# Altium PCB 24V0.5A.PcbDoc
Units mm, origin at the board's own origin, x right, y up, seen from the top; angles counter-clockwise.
Board outline 101.86 x 31.11 mm, 2 copper layers (Top Layer, Bottom Layer); 27 components, 16 nets, 66 pads, 4 vias.
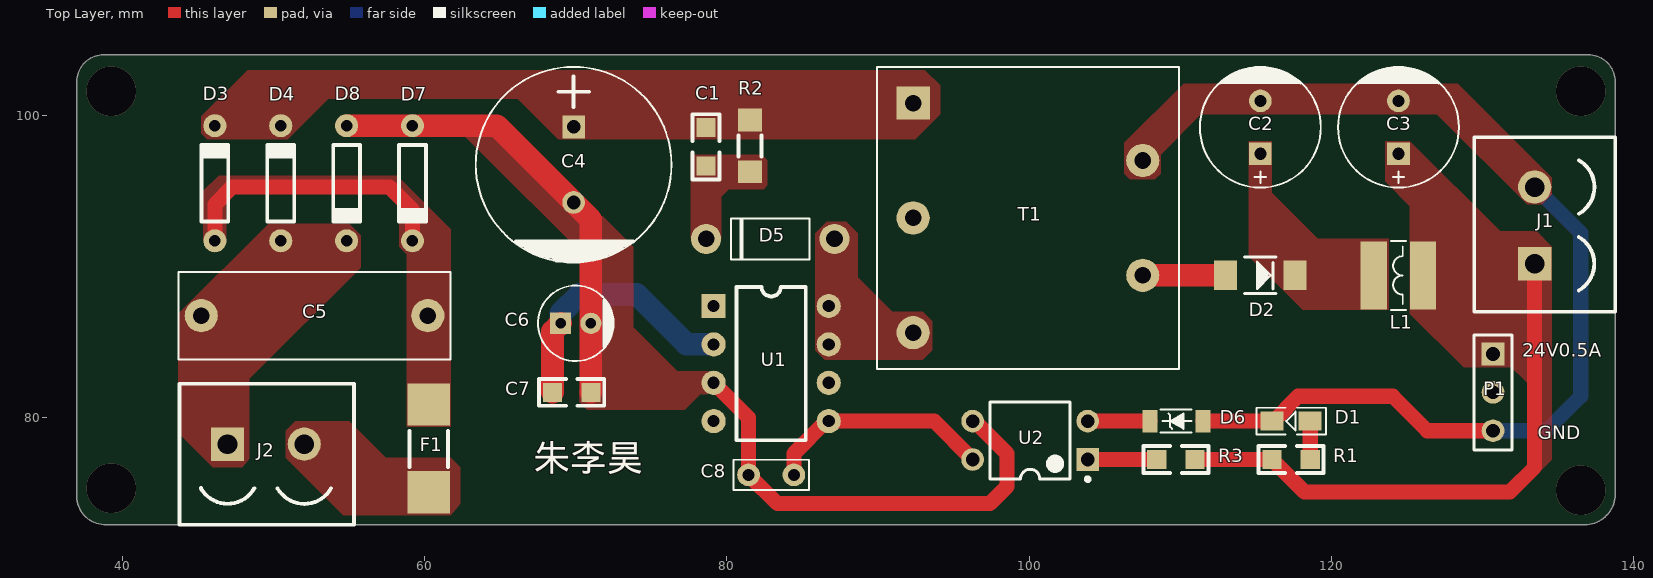
[diagram p0: Top Layer view]
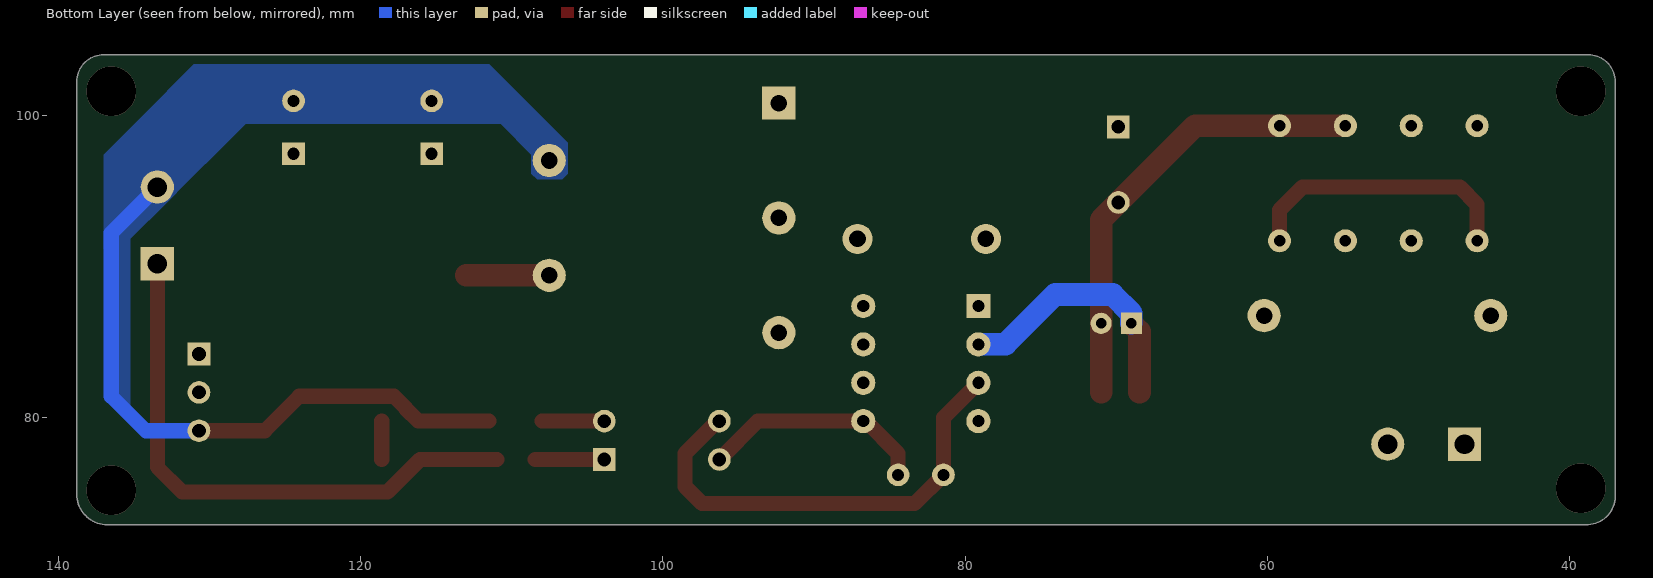
[diagram p1: Bottom Layer view, seen from below]

## Layer stack, top to bottom
Top Solder: solder mask 0.0102, Solder Resist, Dk 3.5
Top Layer: signal copper 0.0356
Dielectric 1: dielectric 0.32, FR-4, Dk 4.8
Bottom Layer: signal copper 0.0356
Bottom Solder: solder mask 0.0102, Solder Resist, Dk 3.5

## Board outline
36.957,74.93 36.957,102.235 cw(c38.735,102.235) 38.735,104.013 137.033,104.013 cw(c137.033,102.235) 138.811,102.235 138.811,74.93 cw(c136.779,74.93) 136.779,72.898 38.735,72.898 cw(c38.862,74.803)

## Design rules (kind name [scope] priority, off if disabled: settings)
Clearance [All] p1: gap=0.254 ignorepadtopadclearanceinfootprint=FALSE except(0: Arc-Hole Track-Hole SMDPad-Hole THPad-Hole Via-Hole Fill-Hole Poly-Hole Region-Hole Text-Hole)
PolygonConnect [All] p1: connectstyle=Direct reliefconductorwidth=0.254 reliefentries=4 polygonreliefangle="90 Angle" airgapwidth=0.254
RoutingVias [All] p1: holewidth=0.711 width=1.27 viastyle="Through Hole" minholewidth=0.711 minwidth=1.27 maxholewidth=4 maxwidth=4
SolderMaskExpansion [All] p1: expansion=0.102 istentingtop=FALSE
Width [All] p1: maxlimit=1.5 minlimit=0.254 preferedwidth=1
30 further rules are at their usual default settings.

## Components (designator, comment, footprint, x,y, rotation, side; value= is the part's Value field where it differs from the comment)
C1 "103 250V" CAP_0805 78.613,96.647 r90 top
C2 "470uF 25V" "CAP POLL 直插电解质8*12/8*16" 115.316,99.211 r90 top
C3 "470uF 25V" "CAP POLL 直插电解质8*12/8*16" 124.46,99.211 r90 top
C4 "33uF 400V" "Cap POLL 直插电解质 13*20" 69.85,99.234 r270 top
C5 "104" Cap安规104 45.198,86.741 r0 top
C6 "22uF 16V" "CAP POLL 直插电解质5*12" 69.993,86.233 r0 top
C7 "22uF 10V" CAP_0805 68.453,81.661 r0 top
C8 "103" CAP瓷片直插 82.931,76.2 r0 top
D1 "LED_" LED_0805 118.618,79.756 r180 top
D2 "US1G" DIO_214 113.016,89.408 r0 top
D3 "1N4007" 直插二极管 46.101,91.694 r90 top
D4 "1N4007" 直插二极管 50.461,91.694 r90 top
D5 "HER107" DO-41 87.122,91.821 r180 top
D6 "22V" LL-34 111.506,79.756 r180 top
D7 "1N4007" 直插二极管 59.182,99.314 r270 top
D8 "1N4007" 直插二极管 54.822,99.314 r270 top
F1 "Fuse" 2410 60.26,75.057 r90 top
J1 "接线端子2P" 接线端子2P 133.477,90.17 r90 top
J2 "接线端子2P" 接线端子2P 46.936,78.232 r0 top
L1 "Inductor_" Inductor_SM4532 122.835,89.408 r0 top value=10uH
P1 "Header 3" HDR1X3 130.72,84.201 r270 top
R1 "51K" Res_0805 118.618,77.216 r180 top
R2 "100K 0.25W" 1206 81.534,96.266 r90 top
R3 "2K 1%" Res_0805 108.458,77.216 r0 top
T1 "变压器-双边-8引脚" 变压器EE20-5_5-剪脚 99.929,93.211 r0 top
U1 "DK1203" DIP-8 79.121,87.376 r0 top
U2 "PC817A" DIP-4 100.076,78.486 r180 top

## Footprints (in the part's own frame and the unit in brackets; to place one, negate y for a bottom-side part, rotate by r counter-clockwise, add the part's x,y. Pads: shape width x height; smd on the part's side, far side on the other; paste and mask are expansions set on the pad)
1206 [mm]
  rect 1.52x1.6 smd: 1(0,0) 2(3.42,0)
  silkscreen extent 1.02,-0.76 2.41,0.76
2410 [mm]
  rect 2.8x2.8 smd: 1(0,0) 2(5.8,0)
  silkscreen extent 1.65,-1.27 4.06,1.27
"CAP POLL 直插电解质5*12" [mm] "脚间距2mm 直径5mm"
  rect 1.4x1.4 hole 0.7: 1(-1,0)
  round 1.4 hole 0.7: 2(1,0)
  silkscreen extent -2.5,-2.5 2.5,2.5
"CAP POLL 直插电解质8*12/8*16" [mm] "脚间距3.5mm 直径8mm"
  rect 1.5x1.5 hole 0.8: 1(-1.75,0)
  round 1.5 hole 0.8: 2(1.75,0)
  silkscreen extent -4,-4 4,4
"Cap POLL 直插电解质 13*20" [mm] "直径12.5mm 脚间距5mm"
  rect 1.5x1.5 hole 0.9: 1(0,0)
  round 1.5 hole 0.9: 2(5,0)
  silkscreen extent -3.98,-6.48 8.98,6.48
CAP_0805 [mm] "Chip Capacitor, 2-Leads, Body 2.0x1.3mm, IPC Medium Density"
  rect 1.27x1.27 smd: 1(0,0) 2(2.54,0)
  silkscreen extent -0.89,-0.89 3.43,0.89
Cap安规104 [mm] "0.1uF  275VAC"
  round 2.2 hole 1.1: 1(0,0) 2(15,0)
  silkscreen extent -1.5,-2.9 16.5,2.9
CAP瓷片直插 [mm]
  round 1.5 hole 0.8: 1(-1.5,0) 2(1.5,0)
  silkscreen extent -2.5,-1 2.5,1
DIO_214 [mm] "Molded Diode, 2-Leads, Body 4.5x2.6mm, IPC Medium Density"
  rect 1.524x1.95 smd: 1(0,0) 2(4.6,0)
  silkscreen extent 1.25,-1.2 3.35,1.2, body extent 0.18,-1.2 4.42,1.19, height 3
DIP-4 [mm] "DIP; 4 Leads; Row Spacing 7.62 mm; Pitch 2.54 mm"
  rect 1.5x1.5 hole 0.9: 1(-3.81,1.27)
  round 1.5 hole 0.9: 2(-3.81,-1.27) 3(3.81,-1.27) 4(3.81,1.27)
  silkscreen extent -3.94,-2.55 2.65,2.69, body extent -3.15,-2.5 3.15,2.5, height 5.6
DIP-8 [mm] "脚间距2.54mm  宽7.62mm"
  rect 1.6x1.6 hole 0.8: 1(0,0)
  round 1.6 hole 0.8: 2(0,-2.54) 3(0,-5.08) 4(0,-7.62) 5(7.62,-7.62) 6(7.62,-5.08) 7(7.62,-2.54) 8(7.62,0)
  silkscreen extent 1.52,-8.89 6.1,1.27
DO-41 [mm] "二极管直插封装"
  round 2 hole 1.1: 1(0,0) 2(8.5,0)
  silkscreen extent 1.65,-1.35 6.85,1.35
HDR1X3 [mm] "Connector; Header; 3 Position"
  rect 1.5x1.5 hole 0.9: 1(0,0)
  round 1.5 hole 0.9: 2(2.54,0) 3(5.08,0)
  silkscreen extent -1.27,-1.27 6.35,1.27
Inductor_SM4532 [mm] "非屏蔽贴片功率电感"
  rect 1.75x4.5 smd: 1(0,0) 2(3.25,0)
  silkscreen extent 1.12,-2.29 2.13,2.29
LED_0805 [mil]
  rect 60x50 smd: 1(0,0) 2(100,0)
  silkscreen extent -41,-35 140,35
LL-34 [mm] "贴片稳压二极管"
  rect 1x1.5 smd: 1(0,0) 2(3.5,0)
  silkscreen extent 0.76,-0.76 2.79,0.76
Res_0805 [mm] "Chip Resistor, 2-Leads, Body 2.0x1.3mm, IPC Medium Density"
  rect 1.27x1.27 smd: 1(0,0) 2(2.54,0)
  silkscreen extent -0.89,-0.89 3.43,0.89
变压器EE20-5_5-剪脚 [mm] "EE20骨架，10个引脚  2、4、7、8、10剪脚"
  round 2.2 hole 1.1: 0(-7.6,0) 4(-7.6,-7.6) 6(7.6,3.8) 7(7.6,-3.8)
  rect 2.2x2.2 hole 1.1: 1(-7.6,7.6)
  silkscreen extent -10,-10 10,10
接线端子2P [mm]
  rect 2.2x2.2 hole 1.3: 1(0,0)
  round 2.2 hole 1.3: 2(5.08,0)
  silkscreen extent -3.18,-5.33 8.38,4
直插二极管 [mil]
  round 60 hole 30: 1(0,0) 2(300,0)
  silkscreen extent 50,-35 250,35

## Part data
C1 C5 C7 C8: library part Cap_2
C2 C3 C4 C6: library part Cap_
D2 D5: library part 1N4007
D6: library part 稳压二极管
P1: "Header, 3-Pin", LatestRevisionDate=17-Jul-2002, LatestRevisionNote="Re-released for DXP Platform.", Publisher="Altium Limited"
R1 R2 R3: library part Res_
U2: library part "光耦 - 1"
F1: I hold="2A 250V"

## Via types
v1: diameter 3.3, hole 3.3, Top Layer to Bottom Layer, 4 vias

## Nets (pads, with @x,y where several pads share a name; then routed paths per layer and width w, separated by ;. In a path a pad name is that pad's centre, name@x,y a point inside that pad or via, vN(x,y) a via of type N, cw(c..) or ccw(c..) an arc to the next point about the centre after c; other vN are vias at no path point)
24V/0.5A: C3.1 J1.1 L1.2 P1.1 R1.2 R3.2 | length 37.5
  Top Layer w1: R3.2 R1.2 118.237,75.057 131.826,75.057 133.477,76.708 J1.1
GND2: C2.2 C3.2 D1.2 D6.1 J1.2 P1.3 T1.6 | length 42.7
  Top Layer w1: D6.1 D1.2 116.205,79.756 117.047,80.598 117.047,80.648 117.806,81.407 124.079,81.407 126.365,79.121 P1.3
  Bottom Layer w1: P1.3 134.239,79.121 136.525,81.407 136.525,92.202 J1.2
L2: F1.1 J2.2
N2: C5.1 D4.1 D8.2 J2.1
NetC1_1: C1.1 D5.2 R2.1
NetC1_2: C1.2 C4.1 D3.2 D4.2 R2.2 T1.1
NetC2_1: C2.1 D2.2 L1.1
NetC4_2: C4.2 C6.2 C7.2 C8.1 D7.1 D8.1 U1.3 U2.3 | length 61
  Top Layer w1: U1.3 81.431,79.986 C8.1 83.336,74.295 97.409,74.295 98.552,75.438 98.552,77.605 96.401,79.756 U2.3
  Top Layer w1.5: D8.1 D7.1 64.77,99.314 70.993,93.091 C6.2 C7.2
NetC5_2: C5.2 D3.1 D7.2 F1.2 | length 18.8
  Top Layer w1: D3.1 46.101,94.107 47.244,95.25 57.658,95.25 59.182,93.726 D7.2 D7.2@59.182,91.836
NetC6_1: C6.1 C7.1 U1.2 | length 17.5
  Top Layer w1.5: C7.1 68.453,85.693 C6.1
  Bottom Layer w1.5: C6.1 68.993,86.9 70.231,88.138 74.041,88.138 77.324,84.855 79.102,84.855 U1.2
NetC8_2: C8.2 U1.5 U2.4 | length 15.2
  Top Layer w1: C8.2 84.431,77.608 86.579,79.756 93.726,79.756 U2.4
NetD1_1: D1.1 R1.1 | length 2.5
  Top Layer w1: R1.1 D1.1
NetD2_1: D2.1 T1.7 | length 5.5
  Top Layer w1.5: T1.7 107.531,89.409 113.015,89.409 D2.1
NetD5_1: D5.1 T1.4 U1.7 U1.8
NetD6_2: D6.2 U2.2 | length 4.1
  Top Layer w1: U2.2 D6.2
NetR3_1: R3.1 U2.1 | length 4.6
  Top Layer w1: U2.1 R3.1
pads on no net: P1.2 T1.0 U1.1 U1.4 U1.6
copper on no net:
  other v1: 136.525,75.184 39.243,75.311 39.243,101.6 136.525,101.6

## Polygon pours and split planes (outlines as drawn)
24V/0.5A on Top Layer "24V/0.5A_L01_P022" (solid, pour order 22): 132.207,89.408 134.366,89.408 134.366,85.852 132.207,83.693
GND2 on Top Layer "GND2_L01_P021" (solid, pour order 21): 106.299,98.171 110.236,102.108 128.397,102.108 134.62,95.885 134.62,94.742 133.985,94.107 132.969,94.107 127,100.076 111.379,100.076 108.712,97.409 108.712,96.139 108.331,95.758 106.68,95.758 106.299,96.139
24V/0.5A on Top Layer "24V/0.5A_L01_P019" (solid, pour order 19): 134.62,86.36 134.62,77.216 133.858,76.454 132.969,77.343 132.969,82.296 131.762,83.502
24V/0.5A on Top Layer "24V/0.5A_L01_P018" (solid, pour order 18): 123.571,98.298 123.571,95.631 125.222,93.98 125.222,86.868 128.778,83.312 131.953,83.312 134.62,85.979 134.62,91.313 133.604,92.329 131.191,92.329 125.222,98.298
NetC2_1 on Top Layer "NETC2_1_L01_P017" (solid, pour order 17): 114.554,98.298 114.554,92.71 114.554,90.678 118.11,87.122 123.825,87.122 123.825,91.821 119.126,91.821 116.078,94.869 116.078,98.298
NetD5_1 on Top Layer "NETD5_1_L01_P016" (solid, pour order 16): 85.852,92.202 86.614,92.964 87.884,92.964 88.646,92.202 88.646,89.281 90.932,86.995 92.964,86.995 93.599,86.36 93.599,84.455 92.964,83.82 86.487,83.82 85.852,84.455
NetC4_2 on Top Layer "NETC4_2_L01_P014" (solid, pour order 14): 70.231,81.788 70.231,81.026 70.739,80.518 77.216,80.518 78.232,81.534 78.867,81.534 77.851,82.55
NetC1_1 on Top Layer "NETC1_1_L01_P013" (solid, pour order 13): 77.597,91.821 77.597,97.409 82.296,97.409 82.677,97.028 82.677,95.377 82.423,95.123 80.137,95.123 79.629,94.615 79.629,91.821
NetC4_2 on Top Layer "NETC4_2_L01_P012" (solid, pour order 12): 61.976,99.314 72.009,89.281 72.009,92.075 64.77,99.314
NetC4_2 on Top Layer "NETC4_2_L01_P009" (solid, pour order 9): 71.628,93.472 73.787,91.313 73.787,85.979 76.708,83.058 78.867,83.058 78.867,82.169 77.978,81.28 77.851,81.407 71.247,81.407
NetC5_2 on Top Layer "NETC5_2_L01_P006" (solid, pour order 6): 45.339,91.694 45.339,94.996 46.355,96.012 58.166,96.012 61.722,92.456 61.722,91.821 60.452,91.821 57.404,94.869 47.371,94.869 46.863,94.361 46.863,91.694
NetC1_2 on Top Layer "NETC1_2_L01_P005" (solid, pour order 5): 50.927,98.425 53.594,101.092 66.167,101.092 68.834,98.425 92.456,98.425 94.107,100.076 94.107,101.981 93.091,102.997 48.26,102.997 45.212,99.949 45.212,98.806 45.593,98.425
NetC5_2 on Top Layer "NETC5_2_L01_P004" (solid, pour order 4): 58.293,91.313 58.293,93.98 59.563,93.98 61.722,91.821 61.722,91.313
NetC5_2 on Top Layer "NETC5_2_L01_P002" (solid, pour order 2): 58.801,79.375 58.801,90.805 58.293,91.313 58.293,92.075 58.801,92.583 60.452,92.583 61.722,91.313 61.722,79.375
N2 on Top Layer "N2_L01_P000" (solid, pour order 0): 47.915,76.708 45.974,76.708 43.688,78.994 43.688,86.868 49.657,92.837 54.991,92.837 55.753,92.075 55.753,89.916 48.387,82.55 48.387,77.258
L2 on Top Layer "L2_L01_P001" (solid, pour order 1): 61.722,73.533 54.61,73.533 50.8,77.343 50.8,79.121 51.435,79.756 54.991,79.756 57.404,77.343 61.722,77.343 62.357,76.708 62.357,74.295
GND2 on Bottom Layer "GND2_L02_P026" (solid, pour order 26): 135.255,92.456 135.255,80.518 136.525,81.788 136.398,81.915 136.398,92.456
GND2 on Bottom Layer "GND2_L02_P025" (solid, pour order 25): 134.62,99.822 137.033,97.409 137.033,91.186 135.89,91.186 132.207,94.869 132.207,98.171 132.969,98.171
GND2 on Bottom Layer "GND2_L02_P024" (solid, pour order 24): 108.331,95.758 106.68,95.758 106.299,96.139 106.299,98.171 111.506,103.378 131.064,103.378 134.62,99.822 134.62,94.742 133.985,94.107 132.969,94.107 127.635,99.441 110.744,99.441 108.712,97.409 108.712,96.139

## Silkscreen, mask and mechanical layers (free items; w line width, h text height)
Top Overlay:
  text "24V0.5A" at 132.66,83.72 h1.52
  text "GND" at 133.687,78.252 h1.52
  text "朱李昊" at 67.222,75.871 h3
Mechanical 1:
  the board outline again, w0.254